# EAGLE board Spannungsversorgung (EAGLE 6.1)
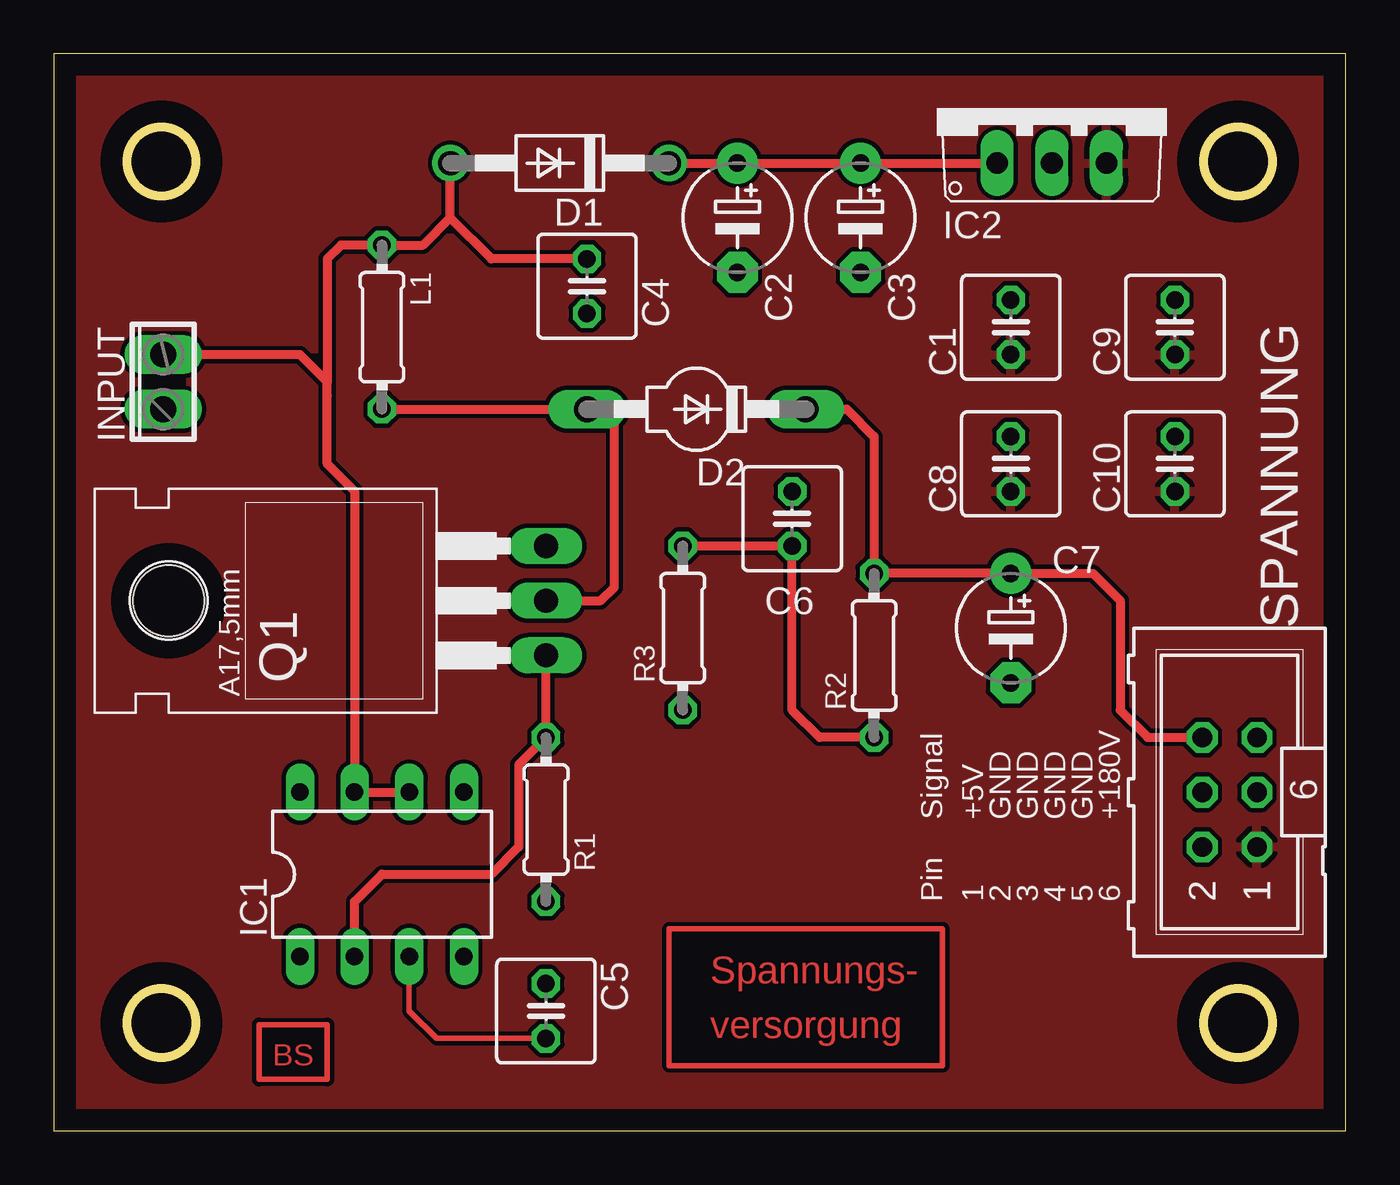
[diagram p0: board, top side]
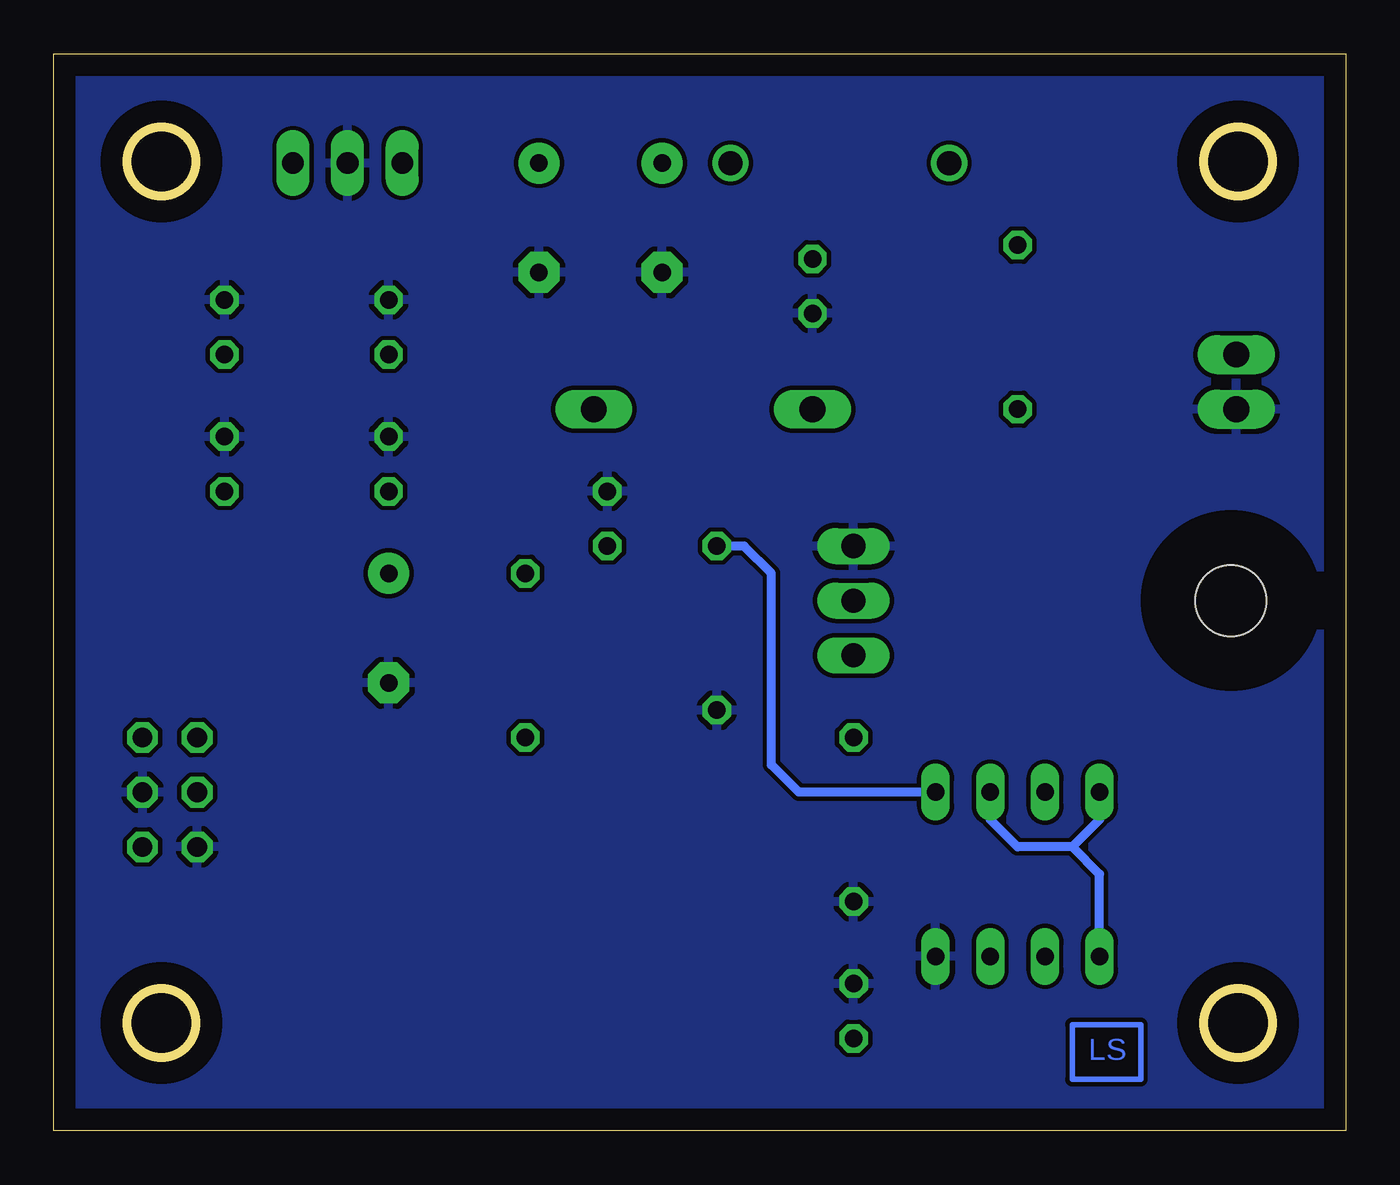
[diagram p1: board, bottom side, seen from below]

Size 60 x 50 mm. Coordinates in mm from the lower left corner, seen from the top.
Outline: 0,0 60,0 60,50 0,50 0,0
Outline: circle at 5,45 radius 1.6
Outline: circle at 5,5 radius 1.6
Outline: circle at 55,45 radius 1.6
Outline: circle at 55,5 radius 1.6
Copper layers (1*16): Top 0.035mm / dielectric 1.5mm / Bottom 0.035mm
Design rules: minimum track width 10mil, minimum drill 24mil, track to track 8mil, track to pad 8mil, pad to pad 8mil, via to via 8mil, smd to smd 8mil, copper to edge 40mil, drill to drill 8mil, minimum pad ring 10mil, minimum via ring 8mil, stop-mask expansion 4mil, vias tented up to drill 0mil, thermal gap 10mil

## Footprints (pad centres in the part's own frame; a part is rotated, then mirrored left to right if it is on the bottom)
C025-050X050 = drill 0.813 octagon: 1 -1.27,0; 2 1.27,0
E5-5 = drill 0.813 pad 1.905: + -2.54,0 | drill 0.813 pad 1.905 octagon: - 2.54,0
DO41-10 = drill 1.118: A 5.08,0; C -5.08,0
SOD57-10 = drill 1.194 long: A 5.08,0; C -5.08,0
DIL08 = drill 0.813 long: 1 -3.81,-3.81; 2 -1.27,-3.81; 3 1.27,-3.81; 4 3.81,-3.81; 5 3.81,3.81; 6 1.27,3.81; 7 -1.27,3.81; 8 -3.81,3.81
TO220V = drill 1.016 long: 1 -2.54,-2.54; 2 0,-2.54; 3 2.54,-2.54
2POL254 = drill 1.2 long: 1 -1.27,0; 2 1.27,0
0204/7 = drill 0.813 octagon: 1 -3.81,0; 2 3.81,0
TO220 = drill 1.118 long: 1 -2.54,-6.35; 2 0,-6.35; 3 2.54,-6.35 | hole 3.302: 0,11.176
ML6 = drill 0.914 octagon: 1 -2.54,-1.27; 2 -2.54,1.27; 3 0,-1.27; 4 0,1.27; 5 2.54,-1.27; 6 2.54,1.27

## Placement (x,y rotation side)
C1  100nF  [C025-050X050]  44.45,37.31 90 top
C2  100µF  [E5-5]  31.75,42.39 270 top
C3  100µF  [E5-5]  37.47,42.39 270 top
C4  100nF  [C025-050X050]  24.77,39.22 90 top
C5  470pF  [C025-050X050]  22.86,5.56 270 top
C6  100nF  [C025-050X050]  34.29,28.42 90 top
C7  10µF  [E5-5]  44.45,23.34 270 top
C8  100nF  [C025-050X050]  44.45,30.96 90 top
C9  100nF  [C025-050X050]  52.07,37.31 90 top
C10  100nF  [C025-050X050]  52.07,30.96 90 top
D1  1N4004  [DO41-10]  23.5,44.93 180 top
D2  BYV26  [SOD57-10]  29.84,33.5 180 top
IC1  MC34063  [DIL08]  15.24,11.91 0 top
IC2  7805TV  [TO220V]  46.35,47.47 0 top
INPUT  [2POL254]  5.08,34.77 90 top
L1  330µH  [0204/7]  15.24,37.31 270 top
Q1  IRF820  [TO220]  16.51,24.61 90 top
R1  150R  [0204/7]  22.86,14.45 90 top
R2  820K  [0204/7]  38.1,22.07 90 top
R3  5k6  [0204/7]  29.21,23.34 90 top
SPANNUNG  J1  [ML6]  54.61,15.72 90 top

## Library data of the parts
C1-C10 L1 R1-R3 = rcl
D1 D2 = diode
IC1 = ic-package
IC2 = linear
INPUT = con-phoenix-254; OC_FARNELL: unknown; OC_NEWARK: unknown
Q1 = transistor-fet
SPANNUNG = con-harting-ml; OC_FARNELL: unknown; OC_NEWARK: unknown

## Nets
+5V: C1.1 C8.1 C9.1 C10.1 IC2.3 SPANNUNG.1
+12V: C4.2 D1.A IC1.1 IC1.6 IC1.7 IC1.8 INPUT.2 L1.1
GND: C1.2 C2.- C3.- C4.1 C5.1 C6.2 C7.- C8.2 C9.2 C10.2 IC1.4 IC2.2 INPUT.1 Q1.3 R1.1 R3.1 SPANNUNG.2 SPANNUNG.3
N$1: C2.+ C3.+ D1.C IC2.1
N$2: D2.A L1.2 Q1.2
N$5: C6.1 IC1.5 R2.1 R3.2
N$6: C5.2 IC1.3
N$7: IC1.2 Q1.1 R1.2
VCC: C7.+ D2.C R2.2 SPANNUNG.6

## Tracks (layer width: path | path; a pad name or v marks a point on that pad's centre or on a via)
+5V
  pour Top: -6.35,62.71 105.41,62.71 105.41,-37.62 -6.35,-37.62
+12V
  Top 0.406: 12.7,34.77 12.7,34.14 12.7,30.96 13.97,29.69 IC1.7 IC1.6 | 12.7,34.77 11.43,36.04 INPUT.2 | 18.41,42.39 17.14,41.12 L1.1 13.34,41.12 12.7,40.48 12.7,34.77 | 18.41,42.39 D1.A | C4.2 20.32,40.48 18.41,42.39
  Bottom 0.406: IC1.8 11.43,14.45 12.7,13.18 | 12.7,13.18 15.24,13.18 16.51,14.45 IC1.6 | IC1.1 11.43,11.91 12.7,13.18
GND
  pour Bottom: -3.81,61.44 104.14,61.44 104.14,-36.35 -3.81,-36.35
N$1
  Top 0.406: D1.C C2.+ C3.+ IC2.1
N$2
  Top 0.406: L1.2 D2.A 25.4,33.5 26.04,32.87 26.04,25.24 25.4,24.61 Q1.2
N$3
  Top 0.254: 28.57,9.37 41.27,9.37 41.27,3.02 28.57,3.02 28.57,9.37
N$4
  Bottom 0.254: 9.53,4.92 12.7,4.92 12.7,2.38 9.53,2.38 9.53,4.92
N$5
  Top 0.406: R2.1 35.56,18.26 34.29,19.53 C6.1 R3.2
  Bottom 0.406: IC1.5 25.4,15.72 26.67,16.99 26.67,25.88 27.94,27.15 R3.2
N$6
  Top 0.254: IC1.3 16.51,5.56 17.78,4.29 C5.2
N$7
  Top 0.406: IC1.2 13.97,10.64 15.24,11.91 20.32,11.91 21.59,13.18 21.59,16.99 R1.2 Q1.1
N$8
  Top 0.254: 9.53,4.92 12.7,4.92 12.7,2.38 9.53,2.38 9.53,4.92
VCC
  Top 0.406: D2.C 36.83,33.5 38.1,32.23 R2.2 C7.+ 48.26,25.88 49.53,24.61 49.53,19.53 50.8,18.26 SPANNUNG.6

## Text on the board
Top: Spannungs- | versorgung | BS
Bottom: LS
tNames: Signal | +5V | GND | GND | GND | GND | +180V | Pin | 1 | 2 | 3 | 4 | 5 | 6